# EAGLE board perfboard160x100mm (EAGLE 7.6.0), part 1 of 3
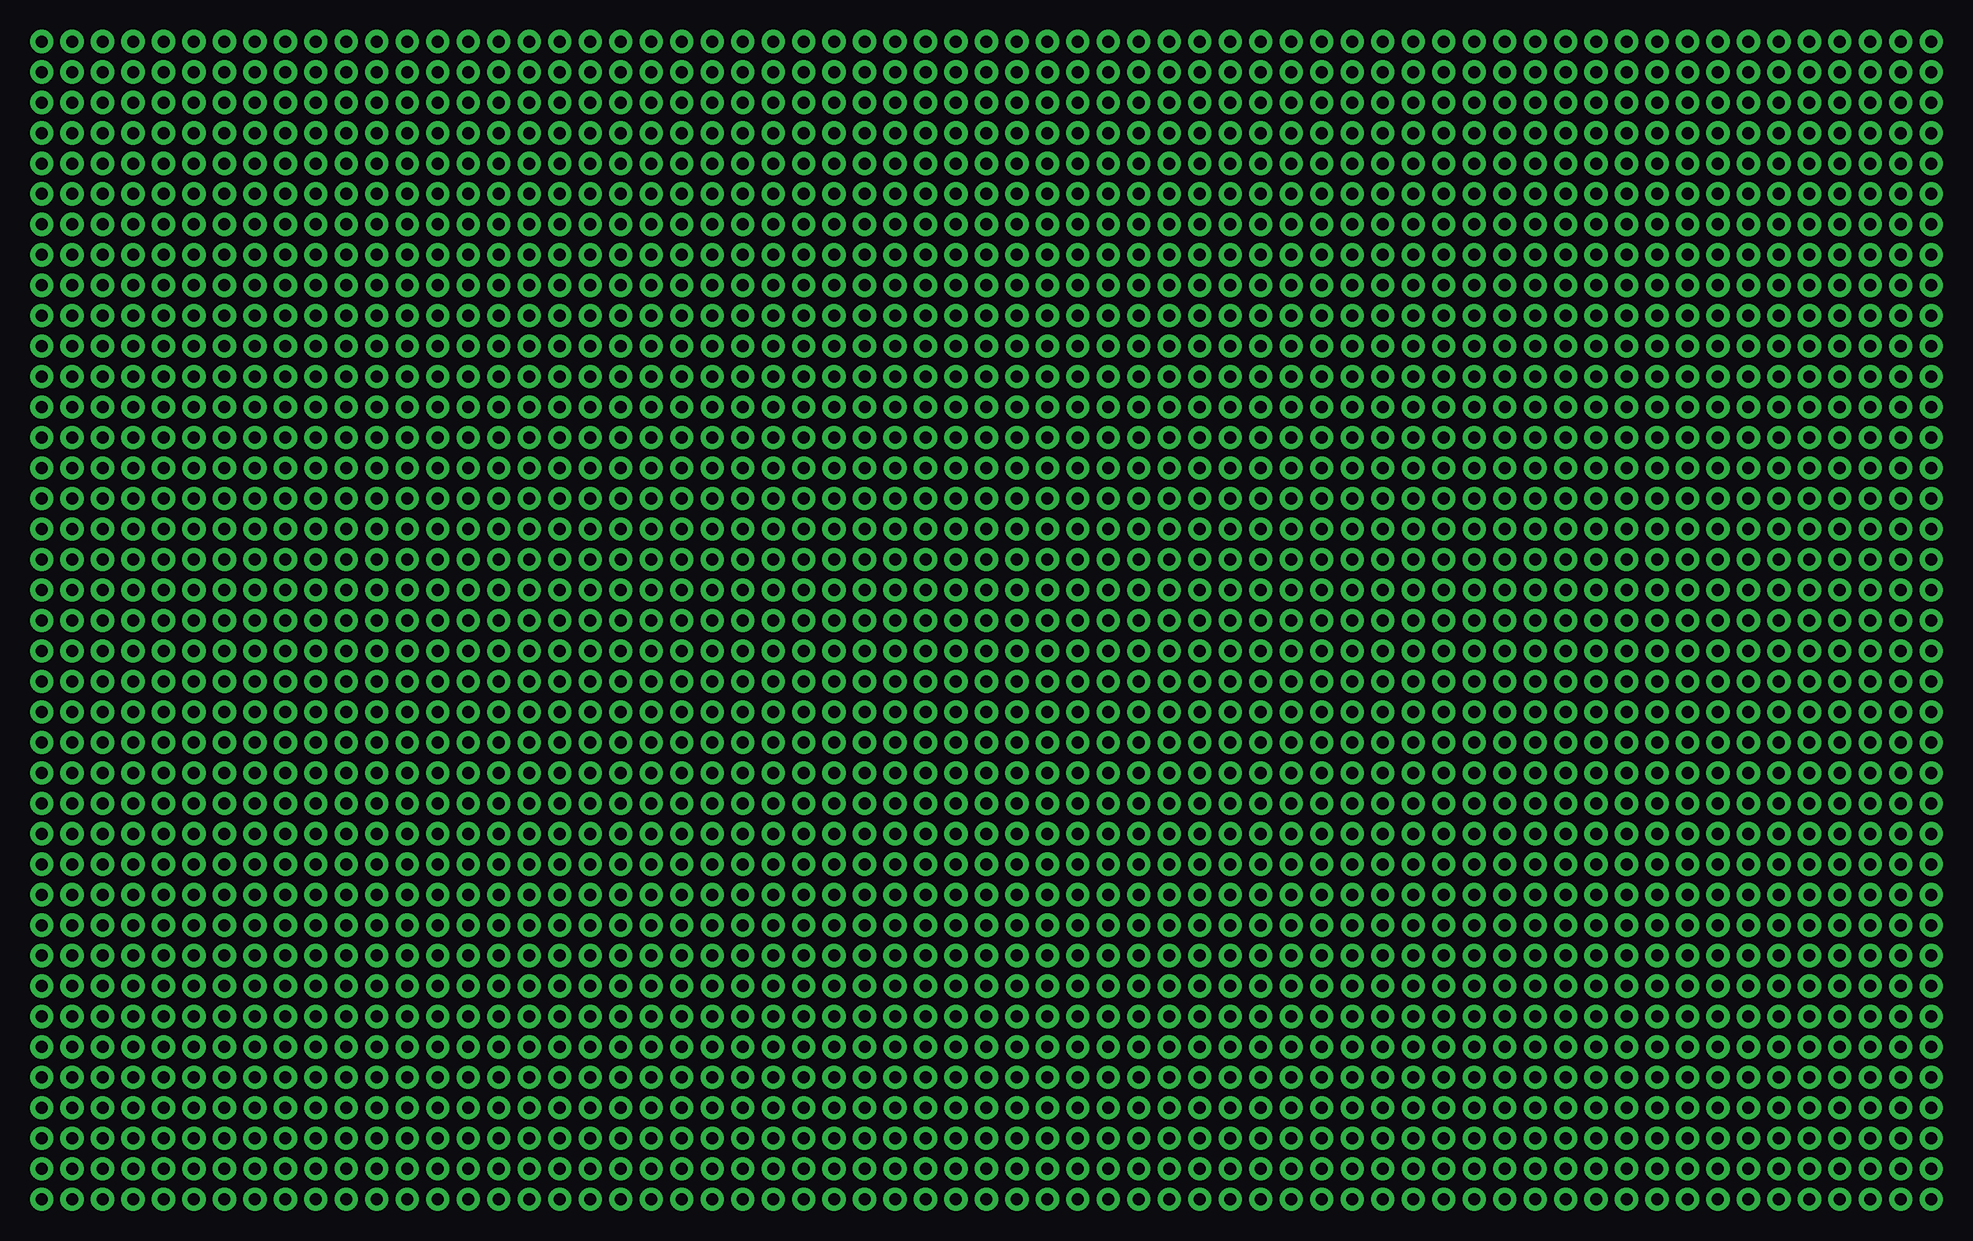
[diagram p0: board, top side]

No outline drawn. Coordinates in mm, seen from the top.
Copper layers (1*16): Top 0.035mm / dielectric 1.5mm / Bottom 0.035mm
Design rules "default": minimum track width 10mil, minimum drill 24mil, track to track 8mil, track to pad 8mil, pad to pad 8mil, via to via 8mil, smd to smd 8mil, copper to edge 40mil, drill to drill 8mil, minimum pad ring 10mil, minimum via ring 8mil, stop-mask expansion 4mil, vias tented up to drill 0mil, thermal gap 10mil

## Placement (x,y rotation side)

## Tracks (layer width: path | path; a pad name or v marks a point on that pad's centre or on a via)
S$1  (via drill 1 pad 1.93)
  other vias: 1.27,97.79
S$2  (via drill 1 pad 1.93)
  other vias: 1.27,95.25
S$3  (via drill 1 pad 1.93)
  other vias: 1.27,92.71
S$4  (via drill 1 pad 1.93)
  other vias: 3.81,97.79
S$5  (via drill 1 pad 1.93)
  other vias: 3.81,95.25
S$6  (via drill 1 pad 1.93)
  other vias: 3.81,92.71
S$7  (via drill 1 pad 1.93)
  other vias: 6.35,97.79
S$8  (via drill 1 pad 1.93)
  other vias: 6.35,95.25
S$9  (via drill 1 pad 1.93)
  other vias: 6.35,92.71
S$10  (via drill 1 pad 1.93)
  other vias: 1.27,85.09 1.27,87.63 1.27,90.17
S$11  (via drill 1 pad 1.93)
  other vias: 3.81,85.09 3.81,87.63 3.81,90.17
S$12  (via drill 1 pad 1.93)
  other vias: 6.35,85.09 6.35,87.63 6.35,90.17
S$13  (via drill 1 pad 1.93)
  other vias: 8.89,97.79
S$14  (via drill 1 pad 1.93)
  other vias: 1.27,82.55
S$15  (via drill 1 pad 1.93)
  other vias: 1.27,80.01
S$16  (via drill 1 pad 1.93)
  other vias: 1.27,77.47
S$17  (via drill 1 pad 1.93)
  other vias: 8.89,95.25
S$18  (via drill 1 pad 1.93)
  other vias: 8.89,92.71
S$19  (via drill 1 pad 1.93)
  other vias: 3.81,82.55
S$20  (via drill 1 pad 1.93)
  other vias: 3.81,80.01
S$21  (via drill 1 pad 1.93)
  other vias: 3.81,77.47
S$22  (via drill 1 pad 1.93)
  other vias: 8.89,85.09 8.89,87.63 8.89,90.17
S$23  (via drill 1 pad 1.93)
  other vias: 11.43,97.79
S$24  (via drill 1 pad 1.93)
  other vias: 11.43,95.25
S$25  (via drill 1 pad 1.93)
  other vias: 11.43,92.71
S$26  (via drill 1 pad 1.93)
  other vias: 11.43,85.09 11.43,87.63 11.43,90.17
S$27  (via drill 1 pad 1.93)
  other vias: 13.97,97.79
S$28  (via drill 1 pad 1.93)
  other vias: 13.97,95.25
S$29  (via drill 1 pad 1.93)
  other vias: 6.35,82.55
S$30  (via drill 1 pad 1.93)
  other vias: 6.35,80.01
S$31  (via drill 1 pad 1.93)
  other vias: 6.35,77.47
S$32  (via drill 1 pad 1.93)
  other vias: 1.27,69.85 1.27,72.39 1.27,74.93
S$33  (via drill 1 pad 1.93)
  other vias: 1.27,67.31
S$34  (via drill 1 pad 1.93)
  other vias: 1.27,64.77
S$35  (via drill 1 pad 1.93)
  other vias: 1.27,62.23
S$36  (via drill 1 pad 1.93)
  other vias: 1.27,59.69
S$37  (via drill 1 pad 1.93)
  other vias: 1.27,57.15
S$38  (via drill 1 pad 1.93)
  other vias: 1.27,54.61
S$39  (via drill 1 pad 1.93)
  other vias: 1.27,52.07
S$40  (via drill 1 pad 1.93)
  other vias: 1.27,49.53
S$41  (via drill 1 pad 1.93)
  other vias: 1.27,46.99
S$42  (via drill 1 pad 1.93)
  other vias: 3.81,69.85 3.81,72.39 3.81,74.93
S$43  (via drill 1 pad 1.93)
  other vias: 3.81,67.31
S$44  (via drill 1 pad 1.93)
  other vias: 3.81,64.77
S$45  (via drill 1 pad 1.93)
  other vias: 3.81,62.23
S$46  (via drill 1 pad 1.93)
  other vias: 3.81,59.69
S$47  (via drill 1 pad 1.93)
  other vias: 3.81,57.15
S$48  (via drill 1 pad 1.93)
  other vias: 3.81,54.61
S$49  (via drill 1 pad 1.93)
  other vias: 3.81,52.07
S$50  (via drill 1 pad 1.93)
  other vias: 3.81,49.53
S$51  (via drill 1 pad 1.93)
  other vias: 3.81,46.99
S$52  (via drill 1 pad 1.93)
  other vias: 6.35,69.85 6.35,72.39 6.35,74.93
S$53  (via drill 1 pad 1.93)
  other vias: 6.35,67.31
S$54  (via drill 1 pad 1.93)
  other vias: 6.35,64.77
S$55  (via drill 1 pad 1.93)
  other vias: 6.35,62.23
S$56  (via drill 1 pad 1.93)
  other vias: 6.35,59.69
S$57  (via drill 1 pad 1.93)
  other vias: 6.35,57.15
S$58  (via drill 1 pad 1.93)
  other vias: 6.35,54.61
S$59  (via drill 1 pad 1.93)
  other vias: 6.35,52.07
S$60  (via drill 1 pad 1.93)
  other vias: 6.35,49.53
S$61  (via drill 1 pad 1.93)
  other vias: 6.35,46.99
S$62  (via drill 1 pad 1.93)
  other vias: 13.97,92.71
S$63  (via drill 1 pad 1.93)
  other vias: 16.51,97.79
S$64  (via drill 1 pad 1.93)
  other vias: 16.51,95.25
S$65  (via drill 1 pad 1.93)
  other vias: 16.51,92.71
S$66  (via drill 1 pad 1.93)
  other vias: 19.05,97.79
S$67  (via drill 1 pad 1.93)
  other vias: 19.05,95.25
S$68  (via drill 1 pad 1.93)
  other vias: 19.05,92.71
S$69  (via drill 1 pad 1.93)
  other vias: 8.89,82.55
S$70  (via drill 1 pad 1.93)
  other vias: 8.89,80.01
S$71  (via drill 1 pad 1.93)
  other vias: 8.89,77.47
S$72  (via drill 1 pad 1.93)
  other vias: 8.89,69.85 8.89,72.39 8.89,74.93
S$73  (via drill 1 pad 1.93)
  other vias: 8.89,67.31
S$74  (via drill 1 pad 1.93)
  other vias: 8.89,64.77
S$75  (via drill 1 pad 1.93)
  other vias: 8.89,62.23
S$76  (via drill 1 pad 1.93)
  other vias: 8.89,59.69
S$77  (via drill 1 pad 1.93)
  other vias: 8.89,57.15
S$78  (via drill 1 pad 1.93)
  other vias: 8.89,54.61
S$79  (via drill 1 pad 1.93)
  other vias: 8.89,52.07
S$80  (via drill 1 pad 1.93)
  other vias: 8.89,49.53
S$81  (via drill 1 pad 1.93)
  other vias: 8.89,46.99
S$82  (via drill 1 pad 1.93)
  other vias: 13.97,85.09 13.97,87.63 13.97,90.17
S$83  (via drill 1 pad 1.93)
  other vias: 16.51,85.09 16.51,87.63 16.51,90.17
S$84  (via drill 1 pad 1.93)
  other vias: 19.05,85.09 19.05,87.63 19.05,90.17
S$85  (via drill 1 pad 1.93)
  other vias: 21.59,97.79
S$86  (via drill 1 pad 1.93)
  other vias: 21.59,95.25
S$87  (via drill 1 pad 1.93)
  other vias: 21.59,92.71
S$88  (via drill 1 pad 1.93)
  other vias: 21.59,85.09 21.59,87.63 21.59,90.17
S$89  (via drill 1 pad 1.93)
  other vias: 11.43,82.55
S$90  (via drill 1 pad 1.93)
  other vias: 11.43,80.01
S$91  (via drill 1 pad 1.93)
  other vias: 11.43,77.47
S$92  (via drill 1 pad 1.93)
  other vias: 11.43,69.85 11.43,72.39 11.43,74.93
S$93  (via drill 1 pad 1.93)
  other vias: 11.43,67.31
S$94  (via drill 1 pad 1.93)
  other vias: 11.43,64.77
S$95  (via drill 1 pad 1.93)
  other vias: 11.43,62.23
S$96  (via drill 1 pad 1.93)
  other vias: 11.43,59.69
S$97  (via drill 1 pad 1.93)
  other vias: 11.43,57.15
S$98  (via drill 1 pad 1.93)
  other vias: 11.43,54.61
S$99  (via drill 1 pad 1.93)
  other vias: 11.43,52.07
S$100  (via drill 1 pad 1.93)
  other vias: 11.43,49.53
S$101  (via drill 1 pad 1.93)
  other vias: 11.43,46.99
S$102  (via drill 1 pad 1.93)
  other vias: 24.13,97.79
S$103  (via drill 1 pad 1.93)
  other vias: 24.13,95.25
S$104  (via drill 1 pad 1.93)
  other vias: 24.13,92.71
S$105  (via drill 1 pad 1.93)
  other vias: 24.13,85.09 24.13,87.63 24.13,90.17
S$106  (via drill 1 pad 1.93)
  other vias: 26.67,97.79
S$107  (via drill 1 pad 1.93)
  other vias: 26.67,95.25
S$108  (via drill 1 pad 1.93)
  other vias: 26.67,92.71
S$109  (via drill 1 pad 1.93)
  other vias: 13.97,82.55
S$110  (via drill 1 pad 1.93)
  other vias: 13.97,80.01
S$111  (via drill 1 pad 1.93)
  other vias: 13.97,77.47
S$112  (via drill 1 pad 1.93)
  other vias: 29.21,97.79
S$113  (via drill 1 pad 1.93)
  other vias: 29.21,95.25
S$114  (via drill 1 pad 1.93)
  other vias: 29.21,92.71
S$115  (via drill 1 pad 1.93)
  other vias: 31.75,97.79
S$116  (via drill 1 pad 1.93)
  other vias: 31.75,95.25
S$117  (via drill 1 pad 1.93)
  other vias: 31.75,92.71
S$118  (via drill 1 pad 1.93)
  other vias: 26.67,85.09 26.67,87.63 26.67,90.17
S$119  (via drill 1 pad 1.93)
  other vias: 16.51,82.55
S$120  (via drill 1 pad 1.93)
  other vias: 16.51,80.01
S$121  (via drill 1 pad 1.93)
  other vias: 16.51,77.47
S$122  (via drill 1 pad 1.93)
  other vias: 29.21,85.09 29.21,87.63 29.21,90.17
S$123  (via drill 1 pad 1.93)
  other vias: 31.75,85.09 31.75,87.63 31.75,90.17
S$124  (via drill 1 pad 1.93)
  other vias: 34.29,97.79
S$125  (via drill 1 pad 1.93)
  other vias: 34.29,95.25
S$126  (via drill 1 pad 1.93)
  other vias: 34.29,92.71
S$127  (via drill 1 pad 1.93)
  other vias: 34.29,85.09 34.29,87.63 34.29,90.17
S$128  (via drill 1 pad 1.93)
  other vias: 36.83,97.79
S$129  (via drill 1 pad 1.93)
  other vias: 19.05,82.55
S$130  (via drill 1 pad 1.93)
  other vias: 19.05,80.01
S$131  (via drill 1 pad 1.93)
  other vias: 19.05,77.47
S$132  (via drill 1 pad 1.93)
  other vias: 13.97,69.85 13.97,72.39 13.97,74.93
S$133  (via drill 1 pad 1.93)
  other vias: 13.97,67.31
S$134  (via drill 1 pad 1.93)
  other vias: 13.97,64.77
S$135  (via drill 1 pad 1.93)
  other vias: 13.97,62.23
S$136  (via drill 1 pad 1.93)
  other vias: 13.97,59.69
S$137  (via drill 1 pad 1.93)
  other vias: 13.97,57.15
S$138  (via drill 1 pad 1.93)
  other vias: 13.97,54.61
S$139  (via drill 1 pad 1.93)
  other vias: 13.97,52.07
S$140  (via drill 1 pad 1.93)
  other vias: 13.97,49.53
S$141  (via drill 1 pad 1.93)
  other vias: 13.97,46.99
S$142  (via drill 1 pad 1.93)
  other vias: 16.51,69.85 16.51,72.39 16.51,74.93
S$143  (via drill 1 pad 1.93)
  other vias: 16.51,67.31
S$144  (via drill 1 pad 1.93)
  other vias: 16.51,64.77
S$145  (via drill 1 pad 1.93)
  other vias: 16.51,62.23
S$146  (via drill 1 pad 1.93)
  other vias: 16.51,59.69
S$147  (via drill 1 pad 1.93)
  other vias: 16.51,57.15
S$148  (via drill 1 pad 1.93)
  other vias: 16.51,54.61
S$149  (via drill 1 pad 1.93)
  other vias: 16.51,52.07
S$150  (via drill 1 pad 1.93)
  other vias: 16.51,49.53
S$151  (via drill 1 pad 1.93)
  other vias: 16.51,46.99
S$152  (via drill 1 pad 1.93)
  other vias: 19.05,69.85 19.05,72.39 19.05,74.93
S$153  (via drill 1 pad 1.93)
  other vias: 19.05,67.31
S$154  (via drill 1 pad 1.93)
  other vias: 19.05,64.77
S$155  (via drill 1 pad 1.93)
  other vias: 19.05,62.23
S$156  (via drill 1 pad 1.93)
  other vias: 19.05,59.69
S$157  (via drill 1 pad 1.93)
  other vias: 19.05,57.15
S$158  (via drill 1 pad 1.93)
  other vias: 19.05,54.61
S$159  (via drill 1 pad 1.93)
  other vias: 19.05,52.07
S$160  (via drill 1 pad 1.93)
  other vias: 19.05,49.53
S$161  (via drill 1 pad 1.93)
  other vias: 19.05,46.99
S$162  (via drill 1 pad 1.93)
  other vias: 36.83,95.25
S$163  (via drill 1 pad 1.93)
  other vias: 36.83,92.71
S$164  (via drill 1 pad 1.93)
  other vias: 36.83,85.09 36.83,87.63 36.83,90.17
S$165  (via drill 1 pad 1.93)
  other vias: 39.37,97.79
S$166  (via drill 1 pad 1.93)
  other vias: 39.37,95.25
S$167  (via drill 1 pad 1.93)
  other vias: 39.37,92.71
S$168  (via drill 1 pad 1.93)
  other vias: 41.91,97.79
S$169  (via drill 1 pad 1.93)
  other vias: 21.59,82.55
S$170  (via drill 1 pad 1.93)
  other vias: 21.59,80.01
S$171  (via drill 1 pad 1.93)
  other vias: 21.59,77.47
S$172  (via drill 1 pad 1.93)
  other vias: 21.59,69.85 21.59,72.39 21.59,74.93
S$173  (via drill 1 pad 1.93)
  other vias: 21.59,67.31
S$174  (via drill 1 pad 1.93)
  other vias: 21.59,64.77
S$175  (via drill 1 pad 1.93)
  other vias: 21.59,62.23
S$176  (via drill 1 pad 1.93)
  other vias: 21.59,59.69
S$177  (via drill 1 pad 1.93)
  other vias: 21.59,57.15
S$178  (via drill 1 pad 1.93)
  other vias: 21.59,54.61
S$179  (via drill 1 pad 1.93)
  other vias: 21.59,52.07
S$180  (via drill 1 pad 1.93)
  other vias: 21.59,49.53
S$181  (via drill 1 pad 1.93)
  other vias: 21.59,46.99
S$182  (via drill 1 pad 1.93)
  other vias: 41.91,95.25
S$183  (via drill 1 pad 1.93)
  other vias: 41.91,92.71
S$184  (via drill 1 pad 1.93)
  other vias: 44.45,97.79
S$185  (via drill 1 pad 1.93)
  other vias: 44.45,95.25
S$186  (via drill 1 pad 1.93)
  other vias: 44.45,92.71
S$187  (via drill 1 pad 1.93)
  other vias: 39.37,85.09 39.37,87.63 39.37,90.17
S$188  (via drill 1 pad 1.93)
  other vias: 41.91,85.09 41.91,87.63 41.91,90.17
S$189  (via drill 1 pad 1.93)
  other vias: 24.13,82.55
S$190  (via drill 1 pad 1.93)
  other vias: 24.13,80.01
S$191  (via drill 1 pad 1.93)
  other vias: 24.13,77.47
S$192  (via drill 1 pad 1.93)
  other vias: 24.13,69.85 24.13,72.39 24.13,74.93
S$193  (via drill 1 pad 1.93)
  other vias: 24.13,67.31
S$194  (via drill 1 pad 1.93)
  other vias: 24.13,64.77
S$195  (via drill 1 pad 1.93)
  other vias: 24.13,62.23
S$196  (via drill 1 pad 1.93)
  other vias: 24.13,59.69
S$197  (via drill 1 pad 1.93)
  other vias: 24.13,57.15
S$198  (via drill 1 pad 1.93)
  other vias: 24.13,54.61
S$199  (via drill 1 pad 1.93)
  other vias: 24.13,52.07
S$200  (via drill 1 pad 1.93)
  other vias: 24.13,49.53
S$201  (via drill 1 pad 1.93)
  other vias: 24.13,46.99
S$202  (via drill 1 pad 1.93)
  other vias: 44.45,85.09 44.45,87.63 44.45,90.17
S$203  (via drill 1 pad 1.93)
  other vias: 46.99,97.79
S$204  (via drill 1 pad 1.93)
  other vias: 46.99,95.25
S$205  (via drill 1 pad 1.93)
  other vias: 46.99,92.71
S$206  (via drill 1 pad 1.93)
  other vias: 46.99,85.09 46.99,87.63 46.99,90.17
S$207  (via drill 1 pad 1.93)
  other vias: 49.53,97.79
S$208  (via drill 1 pad 1.93)
  other vias: 49.53,95.25
S$209  (via drill 1 pad 1.93)
  other vias: 26.67,82.55
S$210  (via drill 1 pad 1.93)
  other vias: 26.67,80.01
S$211  (via drill 1 pad 1.93)
  other vias: 26.67,77.47
S$212  (via drill 1 pad 1.93)
  other vias: 49.53,92.71
S$213  (via drill 1 pad 1.93)
  other vias: 49.53,85.09 49.53,87.63 49.53,90.17
S$214  (via drill 1 pad 1.93)
  other vias: 52.07,97.79
S$215  (via drill 1 pad 1.93)
  other vias: 52.07,95.25
S$216  (via drill 1 pad 1.93)
  other vias: 52.07,92.71
S$217  (via drill 1 pad 1.93)
  other vias: 54.61,97.79
S$218  (via drill 1 pad 1.93)
  other vias: 54.61,95.25
S$219  (via drill 1 pad 1.93)
  other vias: 29.21,82.55
S$220  (via drill 1 pad 1.93)
  other vias: 29.21,80.01
S$221  (via drill 1 pad 1.93)
  other vias: 29.21,77.47
S$222  (via drill 1 pad 1.93)
  other vias: 54.61,92.71
S$223  (via drill 1 pad 1.93)
  other vias: 57.15,97.79
S$224  (via drill 1 pad 1.93)
  other vias: 57.15,95.25
S$225  (via drill 1 pad 1.93)
  other vias: 57.15,92.71
S$226  (via drill 1 pad 1.93)
  other vias: 52.07,85.09 52.07,87.63 52.07,90.17
S$227  (via drill 1 pad 1.93)
  other vias: 54.61,85.09 54.61,87.63 54.61,90.17
S$228  (via drill 1 pad 1.93)
  other vias: 57.15,85.09 57.15,87.63 57.15,90.17
S$229  (via drill 1 pad 1.93)
  other vias: 31.75,82.55
S$230  (via drill 1 pad 1.93)
  other vias: 31.75,80.01
S$231  (via drill 1 pad 1.93)
  other vias: 31.75,77.47
S$232  (via drill 1 pad 1.93)
  other vias: 26.67,69.85 26.67,72.39 26.67,74.93
S$233  (via drill 1 pad 1.93)
  other vias: 26.67,67.31
S$234  (via drill 1 pad 1.93)
  other vias: 26.67,64.77
S$235  (via drill 1 pad 1.93)
  other vias: 26.67,62.23
S$236  (via drill 1 pad 1.93)
  other vias: 26.67,59.69
S$237  (via drill 1 pad 1.93)
  other vias: 26.67,57.15
S$238  (via drill 1 pad 1.93)
  other vias: 26.67,54.61
S$239  (via drill 1 pad 1.93)
  other vias: 26.67,52.07
S$240  (via drill 1 pad 1.93)
  other vias: 26.67,49.53
S$241  (via drill 1 pad 1.93)
  other vias: 26.67,46.99
S$242  (via drill 1 pad 1.93)
  other vias: 29.21,69.85 29.21,72.39 29.21,74.93
S$243  (via drill 1 pad 1.93)
  other vias: 29.21,67.31
S$244  (via drill 1 pad 1.93)
  other vias: 29.21,64.77
S$245  (via drill 1 pad 1.93)
  other vias: 29.21,62.23
S$246  (via drill 1 pad 1.93)
  other vias: 29.21,59.69
S$247  (via drill 1 pad 1.93)
  other vias: 29.21,57.15
S$248  (via drill 1 pad 1.93)
  other vias: 29.21,54.61
S$249  (via drill 1 pad 1.93)
  other vias: 29.21,52.07
S$250  (via drill 1 pad 1.93)
  other vias: 29.21,49.53
S$251  (via drill 1 pad 1.93)
  other vias: 29.21,46.99
S$252  (via drill 1 pad 1.93)
  other vias: 31.75,69.85 31.75,72.39 31.75,74.93
S$253  (via drill 1 pad 1.93)
  other vias: 31.75,67.31
S$254  (via drill 1 pad 1.93)
  other vias: 31.75,64.77
S$255  (via drill 1 pad 1.93)
  other vias: 31.75,62.23
S$256  (via drill 1 pad 1.93)
  other vias: 31.75,59.69
S$257  (via drill 1 pad 1.93)
  other vias: 31.75,57.15
S$258  (via drill 1 pad 1.93)
  other vias: 31.75,54.61
S$259  (via drill 1 pad 1.93)
  other vias: 31.75,52.07
S$260  (via drill 1 pad 1.93)
  other vias: 31.75,49.53
S$261  (via drill 1 pad 1.93)
  other vias: 31.75,46.99
S$262  (via drill 1 pad 1.93)
  other vias: 59.69,97.79
S$263  (via drill 1 pad 1.93)
  other vias: 59.69,95.25
S$264  (via drill 1 pad 1.93)
  other vias: 59.69,92.71
S$265  (via drill 1 pad 1.93)
  other vias: 59.69,85.09 59.69,87.63 59.69,90.17
S$266  (via drill 1 pad 1.93)
  other vias: 62.23,97.79
S$267  (via drill 1 pad 1.93)
  other vias: 62.23,95.25
S$268  (via drill 1 pad 1.93)
  other vias: 62.23,92.71
S$269  (via drill 1 pad 1.93)
  other vias: 34.29,82.55
S$270  (via drill 1 pad 1.93)
  other vias: 34.29,80.01
S$271  (via drill 1 pad 1.93)
  other vias: 34.29,77.47
S$272  (via drill 1 pad 1.93)
  other vias: 34.29,69.85 34.29,72.39 34.29,74.93
S$273  (via drill 1 pad 1.93)
  other vias: 34.29,67.31
S$274  (via drill 1 pad 1.93)
  other vias: 34.29,64.77
S$275  (via drill 1 pad 1.93)
  other vias: 34.29,62.23
S$276  (via drill 1 pad 1.93)
  other vias: 34.29,59.69
S$277  (via drill 1 pad 1.93)
  other vias: 34.29,57.15
S$278  (via drill 1 pad 1.93)
  other vias: 34.29,54.61
S$279  (via drill 1 pad 1.93)
  other vias: 34.29,52.07
S$280  (via drill 1 pad 1.93)
  other vias: 34.29,49.53
S$281  (via drill 1 pad 1.93)
  other vias: 34.29,46.99
S$282  (via drill 1 pad 1.93)
  other vias: 62.23,85.09 62.23,87.63 62.23,90.17
S$283  (via drill 1 pad 1.93)
  other vias: 64.77,97.79
S$284  (via drill 1 pad 1.93)
  other vias: 64.77,95.25
S$285  (via drill 1 pad 1.93)
  other vias: 64.77,92.71
S$286  (via drill 1 pad 1.93)
  other vias: 67.31,97.79
S$287  (via drill 1 pad 1.93)
  other vias: 67.31,95.25
S$288  (via drill 1 pad 1.93)
  other vias: 67.31,92.71
S$289  (via drill 1 pad 1.93)
  other vias: 36.83,82.55
S$290  (via drill 1 pad 1.93)
  other vias: 36.83,80.01
S$291  (via drill 1 pad 1.93)
  other vias: 36.83,77.47
S$292  (via drill 1 pad 1.93)
  other vias: 36.83,69.85 36.83,72.39 36.83,74.93
S$293  (via drill 1 pad 1.93)
  other vias: 36.83,67.31
S$294  (via drill 1 pad 1.93)
  other vias: 36.83,64.77
S$295  (via drill 1 pad 1.93)
  other vias: 36.83,62.23
S$296  (via drill 1 pad 1.93)
  other vias: 36.83,59.69
S$297  (via drill 1 pad 1.93)
  other vias: 36.83,57.15
S$298  (via drill 1 pad 1.93)
  other vias: 36.83,54.61
S$299  (via drill 1 pad 1.93)
  other vias: 36.83,52.07
S$300  (via drill 1 pad 1.93)
  other vias: 36.83,49.53
S$301  (via drill 1 pad 1.93)
  other vias: 36.83,46.99
S$302  (via drill 1 pad 1.93)
  other vias: 69.85,97.79
S$303  (via drill 1 pad 1.93)
  other vias: 69.85,95.25
S$304  (via drill 1 pad 1.93)
  other vias: 69.85,92.71
S$305  (via drill 1 pad 1.93)
  other vias: 64.77,85.09 64.77,87.63 64.77,90.17
S$306  (via drill 1 pad 1.93)
  other vias: 67.31,85.09 67.31,87.63 67.31,90.17
S$307  (via drill 1 pad 1.93)
  other vias: 69.85,85.09 69.85,87.63 69.85,90.17
S$308  (via drill 1 pad 1.93)
  other vias: 72.39,97.79
S$309  (via drill 1 pad 1.93)
  other vias: 39.37,82.55
S$310  (via drill 1 pad 1.93)
  other vias: 39.37,80.01
S$311  (via drill 1 pad 1.93)
  other vias: 39.37,77.47
S$312  (via drill 1 pad 1.93)
  other vias: 72.39,95.25
S$313  (via drill 1 pad 1.93)
  other vias: 72.39,92.71
S$314  (via drill 1 pad 1.93)
  other vias: 72.39,85.09 72.39,87.63 72.39,90.17
S$315  (via drill 1 pad 1.93)
  other vias: 74.93,97.79
S$316  (via drill 1 pad 1.93)
  other vias: 74.93,95.25
S$317  (via drill 1 pad 1.93)
  other vias: 74.93,92.71
S$318  (via drill 1 pad 1.93)
  other vias: 74.93,85.09 74.93,87.63 74.93,90.17
S$319  (via drill 1 pad 1.93)
  other vias: 41.91,82.55
S$320  (via drill 1 pad 1.93)
  other vias: 41.91,80.01
S$321  (via drill 1 pad 1.93)
  other vias: 41.91,77.47
S$322  (via drill 1 pad 1.93)
  other vias: 77.47,82.55
S$323  (via drill 1 pad 1.93)
  other vias: 77.47,80.01
S$324  (via drill 1 pad 1.93)
  other vias: 77.47,77.47
S$325  (via drill 1 pad 1.93)
  other vias: 80.01,82.55
S$326  (via drill 1 pad 1.93)
  other vias: 80.01,80.01
S$327  (via drill 1 pad 1.93)
  other vias: 80.01,77.47
S$328  (via drill 1 pad 1.93)
  other vias: 82.55,82.55
S$329  (via drill 1 pad 1.93)
  other vias: 44.45,82.55
S$330  (via drill 1 pad 1.93)
  other vias: 44.45,80.01
S$331  (via drill 1 pad 1.93)
  other vias: 44.45,77.47
S$332  (via drill 1 pad 1.93)
  other vias: 39.37,69.85 39.37,72.39 39.37,74.93
S$333  (via drill 1 pad 1.93)
  other vias: 39.37,67.31
S$334  (via drill 1 pad 1.93)
  other vias: 39.37,64.77
S$335  (via drill 1 pad 1.93)
  other vias: 39.37,62.23
S$336  (via drill 1 pad 1.93)
  other vias: 39.37,59.69
S$337  (via drill 1 pad 1.93)
  other vias: 39.37,57.15
S$338  (via drill 1 pad 1.93)
  other vias: 39.37,54.61
S$339  (via drill 1 pad 1.93)
  other vias: 39.37,52.07
S$340  (via drill 1 pad 1.93)
  other vias: 39.37,49.53
S$341  (via drill 1 pad 1.93)
  other vias: 39.37,46.99
S$342  (via drill 1 pad 1.93)
  other vias: 41.91,69.85 41.91,72.39 41.91,74.93
S$343  (via drill 1 pad 1.93)
  other vias: 41.91,67.31
S$344  (via drill 1 pad 1.93)
  other vias: 41.91,64.77
S$345  (via drill 1 pad 1.93)
  other vias: 41.91,62.23
S$346  (via drill 1 pad 1.93)
  other vias: 41.91,59.69
S$347  (via drill 1 pad 1.93)
  other vias: 41.91,57.15
S$348  (via drill 1 pad 1.93)
  other vias: 41.91,54.61
S$349  (via drill 1 pad 1.93)
  other vias: 41.91,52.07
S$350  (via drill 1 pad 1.93)
  other vias: 41.91,49.53
S$351  (via drill 1 pad 1.93)
  other vias: 41.91,46.99
S$352  (via drill 1 pad 1.93)
  other vias: 44.45,69.85 44.45,72.39 44.45,74.93
S$353  (via drill 1 pad 1.93)
  other vias: 44.45,67.31
S$354  (via drill 1 pad 1.93)
  other vias: 44.45,64.77
S$355  (via drill 1 pad 1.93)
  other vias: 44.45,62.23
S$356  (via drill 1 pad 1.93)
  other vias: 44.45,59.69
S$357  (via drill 1 pad 1.93)
  other vias: 44.45,57.15
S$358  (via drill 1 pad 1.93)
  other vias: 44.45,54.61
S$359  (via drill 1 pad 1.93)
  other vias: 44.45,52.07
S$360  (via drill 1 pad 1.93)
  other vias: 44.45,49.53
S$361  (via drill 1 pad 1.93)
  other vias: 44.45,46.99
S$362  (via drill 1 pad 1.93)
  other vias: 82.55,80.01
S$363  (via drill 1 pad 1.93)
  other vias: 82.55,77.47
S$364  (via drill 1 pad 1.93)
  other vias: 77.47,69.85 77.47,72.39 77.47,74.93
S$365  (via drill 1 pad 1.93)
  other vias: 77.47,67.31
S$366  (via drill 1 pad 1.93)
  other vias: 77.47,64.77
S$367  (via drill 1 pad 1.93)
  other vias: 77.47,62.23
S$368  (via drill 1 pad 1.93)
  other vias: 77.47,59.69
S$369  (via drill 1 pad 1.93)
  other vias: 46.99,82.55
S$370  (via drill 1 pad 1.93)
  other vias: 46.99,80.01
S$371  (via drill 1 pad 1.93)
  other vias: 46.99,77.47
S$372  (via drill 1 pad 1.93)
  other vias: 46.99,69.85 46.99,72.39 46.99,74.93
S$373  (via drill 1 pad 1.93)
  other vias: 46.99,67.31
S$374  (via drill 1 pad 1.93)
  other vias: 46.99,64.77
S$375  (via drill 1 pad 1.93)
  other vias: 46.99,62.23
S$376  (via drill 1 pad 1.93)
  other vias: 46.99,59.69
S$377  (via drill 1 pad 1.93)
  other vias: 46.99,57.15
S$378  (via drill 1 pad 1.93)
  other vias: 46.99,54.61
S$379  (via drill 1 pad 1.93)
  other vias: 46.99,52.07
S$380  (via drill 1 pad 1.93)
  other vias: 46.99,49.53
S$381  (via drill 1 pad 1.93)
  other vias: 46.99,46.99
S$382  (via drill 1 pad 1.93)
  other vias: 77.47,57.15
S$383  (via drill 1 pad 1.93)
  other vias: 77.47,54.61
S$384  (via drill 1 pad 1.93)
  other vias: 77.47,52.07
S$385  (via drill 1 pad 1.93)
  other vias: 77.47,49.53
S$386  (via drill 1 pad 1.93)
  other vias: 77.47,46.99
S$387  (via drill 1 pad 1.93)
  other vias: 80.01,69.85 80.01,72.39 80.01,74.93
S$388  (via drill 1 pad 1.93)
  other vias: 80.01,67.31
S$389  (via drill 1 pad 1.93)
  other vias: 49.53,82.55
S$390  (via drill 1 pad 1.93)
  other vias: 49.53,80.01
S$391  (via drill 1 pad 1.93)
  other vias: 49.53,77.47
S$392  (via drill 1 pad 1.93)
  other vias: 49.53,69.85 49.53,72.39 49.53,74.93
S$393  (via drill 1 pad 1.93)
  other vias: 49.53,67.31
S$394  (via drill 1 pad 1.93)
  other vias: 49.53,64.77
S$395  (via drill 1 pad 1.93)
  other vias: 49.53,62.23
S$396  (via drill 1 pad 1.93)
  other vias: 49.53,59.69
S$397  (via drill 1 pad 1.93)
  other vias: 49.53,57.15
S$398  (via drill 1 pad 1.93)
  other vias: 49.53,54.61
S$399  (via drill 1 pad 1.93)
  other vias: 49.53,52.07
S$400  (via drill 1 pad 1.93)
  other vias: 49.53,49.53
S$401  (via drill 1 pad 1.93)
  other vias: 49.53,46.99
S$402  (via drill 1 pad 1.93)
  other vias: 1.27,39.37 1.27,41.91 1.27,44.45
S$403  (via drill 1 pad 1.93)
  other vias: 1.27,36.83
S$404  (via drill 1 pad 1.93)
  other vias: 1.27,34.29
S$405  (via drill 1 pad 1.93)
  other vias: 1.27,31.75
S$406  (via drill 1 pad 1.93)
  other vias: 1.27,29.21
S$407  (via drill 1 pad 1.93)
  other vias: 1.27,26.67
S$408  (via drill 1 pad 1.93)
  other vias: 1.27,24.13
S$409  (via drill 1 pad 1.93)
  other vias: 1.27,21.59
S$410  (via drill 1 pad 1.93)
  other vias: 1.27,19.05
S$411  (via drill 1 pad 1.93)
  other vias: 1.27,16.51
S$412  (via drill 1 pad 1.93)
  other vias: 3.81,39.37 3.81,41.91 3.81,44.45
S$413  (via drill 1 pad 1.93)
  other vias: 3.81,36.83
S$414  (via drill 1 pad 1.93)
  other vias: 3.81,34.29
S$415  (via drill 1 pad 1.93)
  other vias: 3.81,31.75
S$416  (via drill 1 pad 1.93)
  other vias: 3.81,29.21
S$417  (via drill 1 pad 1.93)
  other vias: 3.81,26.67
S$418  (via drill 1 pad 1.93)
  other vias: 3.81,24.13
S$419  (via drill 1 pad 1.93)
  other vias: 3.81,21.59
S$420  (via drill 1 pad 1.93)
  other vias: 3.81,19.05
S$421  (via drill 1 pad 1.93)
  other vias: 3.81,16.51
S$422  (via drill 1 pad 1.93)
  other vias: 6.35,39.37 6.35,41.91 6.35,44.45
S$423  (via drill 1 pad 1.93)
  other vias: 6.35,36.83
S$424  (via drill 1 pad 1.93)
  other vias: 6.35,34.29
S$425  (via drill 1 pad 1.93)
  other vias: 6.35,31.75
S$426  (via drill 1 pad 1.93)
  other vias: 6.35,29.21
S$427  (via drill 1 pad 1.93)
  other vias: 6.35,26.67
S$428  (via drill 1 pad 1.93)
  other vias: 6.35,24.13
S$429  (via drill 1 pad 1.93)
  other vias: 6.35,21.59
S$430  (via drill 1 pad 1.93)
  other vias: 6.35,19.05
S$431  (via drill 1 pad 1.93)
  other vias: 6.35,16.51
S$432  (via drill 1 pad 1.93)
  other vias: 1.27,8.89 1.27,11.43 1.27,13.97
S$433  (via drill 1 pad 1.93)
  other vias: 1.27,6.35
S$434  (via drill 1 pad 1.93)
  other vias: 1.27,3.81
S$435  (via drill 1 pad 1.93)
  other vias: 1.27,1.27
S$436  (via drill 1 pad 1.93)
  other vias: 26.67,39.37 26.67,41.91 26.67,44.45
S$437  (via drill 1 pad 1.93)
  other vias: 26.67,36.83
S$438  (via drill 1 pad 1.93)
  other vias: 26.67,34.29
S$439  (via drill 1 pad 1.93)
  other vias: 26.67,31.75
S$440  (via drill 1 pad 1.93)
  other vias: 26.67,29.21
S$441  (via drill 1 pad 1.93)
  other vias: 26.67,26.67
S$442  (via drill 1 pad 1.93)
  other vias: 3.81,8.89 3.81,11.43 3.81,13.97
S$443  (via drill 1 pad 1.93)
  other vias: 3.81,6.35
S$444  (via drill 1 pad 1.93)
  other vias: 3.81,3.81
S$445  (via drill 1 pad 1.93)
  other vias: 26.67,24.13
S$446  (via drill 1 pad 1.93)
  other vias: 26.67,21.59
S$447  (via drill 1 pad 1.93)
  other vias: 26.67,19.05
S$448  (via drill 1 pad 1.93)
  other vias: 3.81,1.27
S$449  (via drill 1 pad 1.93)
  other vias: 26.67,16.51
S$450  (via drill 1 pad 1.93)
  other vias: 29.21,39.37 29.21,41.91 29.21,44.45
S$451  (via drill 1 pad 1.93)
  other vias: 29.21,36.83
S$452  (via drill 1 pad 1.93)
  other vias: 6.35,8.89 6.35,11.43 6.35,13.97
S$453  (via drill 1 pad 1.93)
  other vias: 6.35,6.35
S$454  (via drill 1 pad 1.93)
  other vias: 6.35,3.81
S$455  (via drill 1 pad 1.93)
  other vias: 29.21,34.29
S$456  (via drill 1 pad 1.93)
  other vias: 29.21,31.75
S$457  (via drill 1 pad 1.93)
  other vias: 29.21,29.21
S$458  (via drill 1 pad 1.93)
  other vias: 6.35,1.27
S$459  (via drill 1 pad 1.93)
  other vias: 29.21,26.67
S$460  (via drill 1 pad 1.93)
  other vias: 29.21,24.13
S$461  (via drill 1 pad 1.93)
  other vias: 29.21,21.59
S$462  (via drill 1 pad 1.93)
  other vias: 8.89,39.37 8.89,41.91 8.89,44.45
S$463  (via drill 1 pad 1.93)
  other vias: 8.89,36.83
S$464  (via drill 1 pad 1.93)
  other vias: 8.89,34.29
S$465  (via drill 1 pad 1.93)
  other vias: 8.89,31.75
S$466  (via drill 1 pad 1.93)
  other vias: 8.89,29.21
S$467  (via drill 1 pad 1.93)
  other vias: 8.89,26.67
S$468  (via drill 1 pad 1.93)
  other vias: 8.89,24.13
S$469  (via drill 1 pad 1.93)
  other vias: 8.89,21.59
S$470  (via drill 1 pad 1.93)
  other vias: 8.89,19.05
S$471  (via drill 1 pad 1.93)
  other vias: 8.89,16.51
S$472  (via drill 1 pad 1.93)
  other vias: 8.89,8.89 8.89,11.43 8.89,13.97
S$473  (via drill 1 pad 1.93)
  other vias: 8.89,6.35
S$474  (via drill 1 pad 1.93)
  other vias: 8.89,3.81
S$475  (via drill 1 pad 1.93)
  other vias: 29.21,19.05
S$476  (via drill 1 pad 1.93)
  other vias: 29.21,16.51
S$477  (via drill 1 pad 1.93)
  other vias: 31.75,39.37 31.75,41.91 31.75,44.45
S$478  (via drill 1 pad 1.93)
  other vias: 31.75,36.83
S$479  (via drill 1 pad 1.93)
  other vias: 31.75,34.29
S$480  (via drill 1 pad 1.93)
  other vias: 31.75,31.75
S$481  (via drill 1 pad 1.93)
  other vias: 31.75,29.21
S$482  (via drill 1 pad 1.93)
  other vias: 11.43,39.37 11.43,41.91 11.43,44.45
S$483  (via drill 1 pad 1.93)
  other vias: 11.43,36.83
S$484  (via drill 1 pad 1.93)
  other vias: 11.43,34.29
S$485  (via drill 1 pad 1.93)
  other vias: 11.43,31.75
S$486  (via drill 1 pad 1.93)
  other vias: 11.43,29.21
S$487  (via drill 1 pad 1.93)
  other vias: 11.43,26.67
S$488  (via drill 1 pad 1.93)
  other vias: 11.43,24.13
S$489  (via drill 1 pad 1.93)
  other vias: 11.43,21.59
S$490  (via drill 1 pad 1.93)
  other vias: 11.43,19.05
S$491  (via drill 1 pad 1.93)
  other vias: 11.43,16.51
S$492  (via drill 1 pad 1.93)
  other vias: 11.43,8.89 11.43,11.43 11.43,13.97
S$493  (via drill 1 pad 1.93)
  other vias: 11.43,6.35
S$494  (via drill 1 pad 1.93)
  other vias: 11.43,3.81
S$495  (via drill 1 pad 1.93)
  other vias: 11.43,1.27
S$496  (via drill 1 pad 1.93)
  other vias: 31.75,26.67
S$497  (via drill 1 pad 1.93)
  other vias: 31.75,24.13
S$498  (via drill 1 pad 1.93)
  other vias: 31.75,21.59
S$499  (via drill 1 pad 1.93)
  other vias: 31.75,19.05
S$500  (via drill 1 pad 1.93)
  other vias: 31.75,16.51
S$501  (via drill 1 pad 1.93)
  other vias: 26.67,8.89 26.67,11.43 26.67,13.97
S$502  (via drill 1 pad 1.93)
  other vias: 80.01,64.77
S$503  (via drill 1 pad 1.93)
  other vias: 80.01,62.23
S$504  (via drill 1 pad 1.93)
  other vias: 80.01,59.69
S$505  (via drill 1 pad 1.93)
  other vias: 80.01,57.15
S$506  (via drill 1 pad 1.93)
  other vias: 80.01,54.61
S$507  (via drill 1 pad 1.93)
  other vias: 80.01,52.07
S$508  (via drill 1 pad 1.93)
  other vias: 80.01,49.53
S$509  (via drill 1 pad 1.93)
  other vias: 52.07,82.55
S$510  (via drill 1 pad 1.93)
  other vias: 52.07,80.01
S$511  (via drill 1 pad 1.93)
  other vias: 52.07,77.47
S$512  (via drill 1 pad 1.93)
  other vias: 80.01,46.99
S$513  (via drill 1 pad 1.93)
  other vias: 82.55,69.85 82.55,72.39 82.55,74.93
S$514  (via drill 1 pad 1.93)
  other vias: 82.55,67.31
S$515  (via drill 1 pad 1.93)
  other vias: 82.55,64.77
S$516  (via drill 1 pad 1.93)
  other vias: 82.55,62.23
S$517  (via drill 1 pad 1.93)
  other vias: 82.55,59.69
S$518  (via drill 1 pad 1.93)
  other vias: 82.55,57.15
S$519  (via drill 1 pad 1.93)
  other vias: 54.61,82.55
S$520  (via drill 1 pad 1.93)
  other vias: 54.61,80.01
S$521  (via drill 1 pad 1.93)
  other vias: 54.61,77.47
S$522  (via drill 1 pad 1.93)
  other vias: 82.55,54.61
S$523  (via drill 1 pad 1.93)
  other vias: 82.55,52.07
S$524  (via drill 1 pad 1.93)
  other vias: 82.55,49.53
S$525  (via drill 1 pad 1.93)
  other vias: 82.55,46.99
S$526  (via drill 1 pad 1.93)
  other vias: 85.09,82.55
S$527  (via drill 1 pad 1.93)
  other vias: 85.09,80.01
S$528  (via drill 1 pad 1.93)
  other vias: 85.09,77.47
S$529  (via drill 1 pad 1.93)
  other vias: 57.15,82.55
S$530  (via drill 1 pad 1.93)
  other vias: 57.15,80.01
S$531  (via drill 1 pad 1.93)
  other vias: 57.15,77.47
S$532  (via drill 1 pad 1.93)
  other vias: 52.07,69.85 52.07,72.39 52.07,74.93
S$533  (via drill 1 pad 1.93)
  other vias: 52.07,67.31
S$534  (via drill 1 pad 1.93)
  other vias: 52.07,64.77
S$535  (via drill 1 pad 1.93)
  other vias: 52.07,62.23
S$536  (via drill 1 pad 1.93)
  other vias: 52.07,59.69
S$537  (via drill 1 pad 1.93)
  other vias: 52.07,57.15
S$538  (via drill 1 pad 1.93)
  other vias: 52.07,54.61
S$539  (via drill 1 pad 1.93)
  other vias: 52.07,52.07
S$540  (via drill 1 pad 1.93)
  other vias: 52.07,49.53
S$541  (via drill 1 pad 1.93)
  other vias: 52.07,46.99
S$542  (via drill 1 pad 1.93)
  other vias: 54.61,69.85 54.61,72.39 54.61,74.93
S$543  (via drill 1 pad 1.93)
  other vias: 54.61,67.31
S$544  (via drill 1 pad 1.93)
  other vias: 54.61,64.77
S$545  (via drill 1 pad 1.93)
  other vias: 54.61,62.23
S$546  (via drill 1 pad 1.93)
  other vias: 54.61,59.69
S$547  (via drill 1 pad 1.93)
  other vias: 54.61,57.15
S$548  (via drill 1 pad 1.93)
  other vias: 54.61,54.61
S$549  (via drill 1 pad 1.93)
  other vias: 54.61,52.07
S$550  (via drill 1 pad 1.93)
  other vias: 54.61,49.53
S$551  (via drill 1 pad 1.93)
  other vias: 54.61,46.99
S$552  (via drill 1 pad 1.93)
  other vias: 57.15,69.85 57.15,72.39 57.15,74.93
S$553  (via drill 1 pad 1.93)
  other vias: 57.15,67.31
S$554  (via drill 1 pad 1.93)
  other vias: 57.15,64.77
S$555  (via drill 1 pad 1.93)
  other vias: 57.15,62.23
S$556  (via drill 1 pad 1.93)
  other vias: 57.15,59.69
S$557  (via drill 1 pad 1.93)
  other vias: 57.15,57.15
S$558  (via drill 1 pad 1.93)
  other vias: 57.15,54.61
S$559  (via drill 1 pad 1.93)
  other vias: 57.15,52.07
S$560  (via drill 1 pad 1.93)
  other vias: 57.15,49.53
S$561  (via drill 1 pad 1.93)
  other vias: 57.15,46.99
S$562  (via drill 1 pad 1.93)
  other vias: 85.09,69.85 85.09,72.39 85.09,74.93
S$563  (via drill 1 pad 1.93)
  other vias: 85.09,67.31
S$564  (via drill 1 pad 1.93)
  other vias: 85.09,64.77
S$565  (via drill 1 pad 1.93)
  other vias: 85.09,62.23
S$566  (via drill 1 pad 1.93)
  other vias: 85.09,59.69
S$567  (via drill 1 pad 1.93)
  other vias: 85.09,57.15
S$568  (via drill 1 pad 1.93)
  other vias: 85.09,54.61
S$569  (via drill 1 pad 1.93)
  other vias: 59.69,82.55
S$570  (via drill 1 pad 1.93)
  other vias: 59.69,80.01
S$571  (via drill 1 pad 1.93)
  other vias: 59.69,77.47
S$572  (via drill 1 pad 1.93)
  other vias: 59.69,69.85 59.69,72.39 59.69,74.93
S$573  (via drill 1 pad 1.93)
  other vias: 59.69,67.31
S$574  (via drill 1 pad 1.93)
  other vias: 59.69,64.77
S$575  (via drill 1 pad 1.93)
  other vias: 59.69,62.23
S$576  (via drill 1 pad 1.93)
  other vias: 59.69,59.69
S$577  (via drill 1 pad 1.93)
  other vias: 59.69,57.15
S$578  (via drill 1 pad 1.93)
  other vias: 59.69,54.61
S$579  (via drill 1 pad 1.93)
  other vias: 59.69,52.07
S$580  (via drill 1 pad 1.93)
  other vias: 59.69,49.53
S$581  (via drill 1 pad 1.93)
  other vias: 59.69,46.99
S$582  (via drill 1 pad 1.93)
  other vias: 85.09,52.07
S$583  (via drill 1 pad 1.93)
  other vias: 85.09,49.53
S$584  (via drill 1 pad 1.93)
  other vias: 85.09,46.99
S$585  (via drill 1 pad 1.93)
  other vias: 87.63,82.55
S$586  (via drill 1 pad 1.93)
  other vias: 87.63,80.01
S$587  (via drill 1 pad 1.93)
  other vias: 87.63,77.47
S$588  (via drill 1 pad 1.93)
  other vias: 87.63,69.85 87.63,72.39 87.63,74.93
S$589  (via drill 1 pad 1.93)
  other vias: 62.23,82.55
S$590  (via drill 1 pad 1.93)
  other vias: 62.23,80.01
S$591  (via drill 1 pad 1.93)
  other vias: 62.23,77.47
S$592  (via drill 1 pad 1.93)
  other vias: 62.23,69.85 62.23,72.39 62.23,74.93
S$593  (via drill 1 pad 1.93)
  other vias: 62.23,67.31
S$594  (via drill 1 pad 1.93)
  other vias: 62.23,64.77
S$595  (via drill 1 pad 1.93)
  other vias: 62.23,62.23
S$596  (via drill 1 pad 1.93)
  other vias: 62.23,59.69
S$597  (via drill 1 pad 1.93)
  other vias: 62.23,57.15
S$598  (via drill 1 pad 1.93)
  other vias: 62.23,54.61
S$599  (via drill 1 pad 1.93)
  other vias: 62.23,52.07
S$600  (via drill 1 pad 1.93)
  other vias: 62.23,49.53
S$601  (via drill 1 pad 1.93)
  other vias: 62.23,46.99
S$602  (via drill 1 pad 1.93)
  other vias: 87.63,67.31
S$603  (via drill 1 pad 1.93)
  other vias: 87.63,64.77
S$604  (via drill 1 pad 1.93)
  other vias: 87.63,62.23
S$605  (via drill 1 pad 1.93)
  other vias: 87.63,59.69
S$606  (via drill 1 pad 1.93)
  other vias: 87.63,57.15
S$607  (via drill 1 pad 1.93)
  other vias: 87.63,54.61
S$608  (via drill 1 pad 1.93)
  other vias: 87.63,52.07
S$609  (via drill 1 pad 1.93)
  other vias: 64.77,82.55
S$610  (via drill 1 pad 1.93)
  other vias: 64.77,80.01
S$611  (via drill 1 pad 1.93)
  other vias: 64.77,77.47
S$612  (via drill 1 pad 1.93)
  other vias: 87.63,49.53
S$613  (via drill 1 pad 1.93)
  other vias: 87.63,46.99
S$614  (via drill 1 pad 1.93)
  other vias: 90.17,82.55
S$615  (via drill 1 pad 1.93)
  other vias: 90.17,80.01
S$616  (via drill 1 pad 1.93)
  other vias: 90.17,77.47
S$617  (via drill 1 pad 1.93)
  other vias: 92.71,82.55
S$618  (via drill 1 pad 1.93)
  other vias: 92.71,80.01
S$619  (via drill 1 pad 1.93)
  other vias: 67.31,82.55
S$620  (via drill 1 pad 1.93)
  other vias: 67.31,80.01
S$621  (via drill 1 pad 1.93)
  other vias: 67.31,77.47
S$622  (via drill 1 pad 1.93)
  other vias: 92.71,77.47
S$623  (via drill 1 pad 1.93)
  other vias: 95.25,82.55
S$624  (via drill 1 pad 1.93)
  other vias: 95.25,80.01
S$625  (via drill 1 pad 1.93)
  other vias: 95.25,77.47
S$626  (via drill 1 pad 1.93)
  other vias: 90.17,69.85 90.17,72.39 90.17,74.93
S$627  (via drill 1 pad 1.93)
  other vias: 90.17,67.31
S$628  (via drill 1 pad 1.93)
  other vias: 90.17,64.77
S$629  (via drill 1 pad 1.93)
  other vias: 69.85,82.55
S$630  (via drill 1 pad 1.93)
  other vias: 69.85,80.01
S$631  (via drill 1 pad 1.93)
  other vias: 69.85,77.47
S$632  (via drill 1 pad 1.93)
  other vias: 64.77,69.85 64.77,72.39 64.77,74.93
S$633  (via drill 1 pad 1.93)
  other vias: 64.77,67.31
S$634  (via drill 1 pad 1.93)
  other vias: 64.77,64.77
S$635  (via drill 1 pad 1.93)
  other vias: 64.77,62.23
S$636  (via drill 1 pad 1.93)
  other vias: 64.77,59.69
S$637  (via drill 1 pad 1.93)
  other vias: 64.77,57.15
S$638  (via drill 1 pad 1.93)
  other vias: 64.77,54.61
S$639  (via drill 1 pad 1.93)
  other vias: 64.77,52.07
S$640  (via drill 1 pad 1.93)
  other vias: 64.77,49.53
S$641  (via drill 1 pad 1.93)
  other vias: 64.77,46.99
S$642  (via drill 1 pad 1.93)
  other vias: 67.31,69.85 67.31,72.39 67.31,74.93
S$643  (via drill 1 pad 1.93)
  other vias: 67.31,67.31
S$644  (via drill 1 pad 1.93)
  other vias: 67.31,64.77
S$645  (via drill 1 pad 1.93)
  other vias: 67.31,62.23
S$646  (via drill 1 pad 1.93)
  other vias: 67.31,59.69
S$647  (via drill 1 pad 1.93)
  other vias: 67.31,57.15
S$648  (via drill 1 pad 1.93)
  other vias: 67.31,54.61
S$649  (via drill 1 pad 1.93)
  other vias: 67.31,52.07
S$650  (via drill 1 pad 1.93)
  other vias: 67.31,49.53
S$651  (via drill 1 pad 1.93)
  other vias: 67.31,46.99
S$652  (via drill 1 pad 1.93)
  other vias: 69.85,69.85 69.85,72.39 69.85,74.93
S$653  (via drill 1 pad 1.93)
  other vias: 69.85,67.31
S$654  (via drill 1 pad 1.93)
  other vias: 69.85,64.77
S$655  (via drill 1 pad 1.93)
  other vias: 69.85,62.23
S$656  (via drill 1 pad 1.93)
  other vias: 69.85,59.69
S$657  (via drill 1 pad 1.93)
  other vias: 69.85,57.15
S$658  (via drill 1 pad 1.93)
  other vias: 69.85,54.61
S$659  (via drill 1 pad 1.93)
  other vias: 69.85,52.07
S$660  (via drill 1 pad 1.93)
  other vias: 69.85,49.53
S$661  (via drill 1 pad 1.93)
  other vias: 69.85,46.99
S$662  (via drill 1 pad 1.93)
  other vias: 90.17,62.23
S$663  (via drill 1 pad 1.93)
  other vias: 90.17,59.69
S$664  (via drill 1 pad 1.93)
  other vias: 90.17,57.15
S$665  (via drill 1 pad 1.93)
  other vias: 90.17,54.61
S$666  (via drill 1 pad 1.93)
  other vias: 90.17,52.07
S$667  (via drill 1 pad 1.93)
  other vias: 90.17,49.53
S$668  (via drill 1 pad 1.93)
  other vias: 90.17,46.99
S$669  (via drill 1 pad 1.93)
  other vias: 72.39,82.55
S$670  (via drill 1 pad 1.93)
  other vias: 72.39,80.01
S$671  (via drill 1 pad 1.93)
  other vias: 72.39,77.47
S$672  (via drill 1 pad 1.93)
  other vias: 72.39,69.85 72.39,72.39 72.39,74.93
S$673  (via drill 1 pad 1.93)
  other vias: 72.39,67.31
S$674  (via drill 1 pad 1.93)
  other vias: 72.39,64.77
S$675  (via drill 1 pad 1.93)
  other vias: 72.39,62.23
S$676  (via drill 1 pad 1.93)
  other vias: 72.39,59.69
S$677  (via drill 1 pad 1.93)
  other vias: 72.39,57.15
S$678  (via drill 1 pad 1.93)
  other vias: 72.39,54.61
S$679  (via drill 1 pad 1.93)
  other vias: 72.39,52.07
S$680  (via drill 1 pad 1.93)
  other vias: 72.39,49.53
S$681  (via drill 1 pad 1.93)
  other vias: 72.39,46.99
S$682  (via drill 1 pad 1.93)
  other vias: 92.71,69.85 92.71,72.39 92.71,74.93
S$683  (via drill 1 pad 1.93)
  other vias: 92.71,67.31
S$684  (via drill 1 pad 1.93)
  other vias: 92.71,64.77
S$685  (via drill 1 pad 1.93)
  other vias: 92.71,62.23
S$686  (via drill 1 pad 1.93)
  other vias: 92.71,59.69
S$687  (via drill 1 pad 1.93)
  other vias: 92.71,57.15
S$688  (via drill 1 pad 1.93)
  other vias: 92.71,54.61
S$689  (via drill 1 pad 1.93)
  other vias: 74.93,82.55
S$690  (via drill 1 pad 1.93)
  other vias: 74.93,80.01
S$691  (via drill 1 pad 1.93)
  other vias: 74.93,77.47
S$692  (via drill 1 pad 1.93)
  other vias: 74.93,69.85 74.93,72.39 74.93,74.93
S$693  (via drill 1 pad 1.93)
  other vias: 74.93,67.31
S$694  (via drill 1 pad 1.93)
  other vias: 74.93,64.77
S$695  (via drill 1 pad 1.93)
  other vias: 74.93,62.23
S$696  (via drill 1 pad 1.93)
  other vias: 74.93,59.69
S$697  (via drill 1 pad 1.93)
  other vias: 74.93,57.15
S$698  (via drill 1 pad 1.93)
  other vias: 74.93,54.61
S$699  (via drill 1 pad 1.93)
  other vias: 74.93,52.07
S$700  (via drill 1 pad 1.93)
  other vias: 74.93,49.53
S$701  (via drill 1 pad 1.93)
  other vias: 74.93,46.99
S$702  (via drill 1 pad 1.93)
  other vias: 13.97,39.37 13.97,41.91 13.97,44.45
S$703  (via drill 1 pad 1.93)
  other vias: 13.97,36.83
S$704  (via drill 1 pad 1.93)
  other vias: 13.97,34.29
S$705  (via drill 1 pad 1.93)
  other vias: 13.97,31.75
S$706  (via drill 1 pad 1.93)
  other vias: 13.97,29.21
S$707  (via drill 1 pad 1.93)
  other vias: 13.97,26.67
S$708  (via drill 1 pad 1.93)
  other vias: 13.97,24.13
S$709  (via drill 1 pad 1.93)
  other vias: 13.97,21.59
S$710  (via drill 1 pad 1.93)
  other vias: 13.97,19.05
S$711  (via drill 1 pad 1.93)
  other vias: 13.97,16.51
S$712  (via drill 1 pad 1.93)
  other vias: 16.51,39.37 16.51,41.91 16.51,44.45
S$713  (via drill 1 pad 1.93)
  other vias: 16.51,36.83
S$714  (via drill 1 pad 1.93)
  other vias: 16.51,34.29
S$715  (via drill 1 pad 1.93)
  other vias: 16.51,31.75
S$716  (via drill 1 pad 1.93)
  other vias: 16.51,29.21
S$717  (via drill 1 pad 1.93)
  other vias: 16.51,26.67
S$718  (via drill 1 pad 1.93)
  other vias: 16.51,24.13
S$719  (via drill 1 pad 1.93)
  other vias: 16.51,21.59
S$720  (via drill 1 pad 1.93)
  other vias: 16.51,19.05
S$721  (via drill 1 pad 1.93)
  other vias: 16.51,16.51
S$722  (via drill 1 pad 1.93)
  other vias: 19.05,39.37 19.05,41.91 19.05,44.45
S$723  (via drill 1 pad 1.93)
  other vias: 19.05,36.83
S$724  (via drill 1 pad 1.93)
  other vias: 19.05,34.29
S$725  (via drill 1 pad 1.93)
  other vias: 19.05,31.75
S$726  (via drill 1 pad 1.93)
  other vias: 19.05,29.21
S$727  (via drill 1 pad 1.93)
  other vias: 19.05,26.67
S$728  (via drill 1 pad 1.93)
  other vias: 19.05,24.13
S$729  (via drill 1 pad 1.93)
  other vias: 19.05,21.59
S$730  (via drill 1 pad 1.93)
  other vias: 19.05,19.05
S$731  (via drill 1 pad 1.93)
  other vias: 19.05,16.51
S$732  (via drill 1 pad 1.93)
  other vias: 13.97,8.89 13.97,11.43 13.97,13.97
S$733  (via drill 1 pad 1.93)
  other vias: 13.97,6.35
S$734  (via drill 1 pad 1.93)
  other vias: 13.97,3.81
S$735  (via drill 1 pad 1.93)
  other vias: 13.97,1.27
S$736  (via drill 1 pad 1.93)
  other vias: 26.67,6.35
S$737  (via drill 1 pad 1.93)
  other vias: 26.67,3.81
S$738  (via drill 1 pad 1.93)
  other vias: 26.67,1.27
S$739  (via drill 1 pad 1.93)
  other vias: 29.21,8.89 29.21,11.43 29.21,13.97
S$740  (via drill 1 pad 1.93)
  other vias: 29.21,6.35
S$741  (via drill 1 pad 1.93)
  other vias: 29.21,3.81
S$742  (via drill 1 pad 1.93)
  other vias: 16.51,8.89 16.51,11.43 16.51,13.97
S$743  (via drill 1 pad 1.93)
  other vias: 16.51,6.35
S$744  (via drill 1 pad 1.93)
  other vias: 16.51,3.81
S$745  (via drill 1 pad 1.93)
  other vias: 16.51,1.27
S$746  (via drill 1 pad 1.93)
  other vias: 29.21,1.27
S$747  (via drill 1 pad 1.93)
  other vias: 31.75,8.89 31.75,11.43 31.75,13.97
S$748  (via drill 1 pad 1.93)
  other vias: 31.75,6.35
S$749  (via drill 1 pad 1.93)
  other vias: 31.75,3.81
S$750  (via drill 1 pad 1.93)
  other vias: 31.75,1.27
S$751  (via drill 1 pad 1.93)
  other vias: 34.29,39.37 34.29,41.91 34.29,44.45
S$752  (via drill 1 pad 1.93)
  other vias: 19.05,8.89 19.05,11.43 19.05,13.97
S$753  (via drill 1 pad 1.93)
  other vias: 19.05,6.35
S$754  (via drill 1 pad 1.93)
  other vias: 19.05,3.81
S$755  (via drill 1 pad 1.93)
  other vias: 19.05,1.27
S$756  (via drill 1 pad 1.93)
  other vias: 34.29,36.83
S$757  (via drill 1 pad 1.93)
  other vias: 8.89,1.27
S$758  (via drill 1 pad 1.93)
  other vias: 34.29,34.29
S$759  (via drill 1 pad 1.93)
  other vias: 34.29,31.75
S$760  (via drill 1 pad 1.93)
  other vias: 34.29,29.21
S$761  (via drill 1 pad 1.93)
  other vias: 34.29,26.67
S$762  (via drill 1 pad 1.93)
  other vias: 21.59,39.37 21.59,41.91 21.59,44.45
S$763  (via drill 1 pad 1.93)
  other vias: 21.59,36.83
S$764  (via drill 1 pad 1.93)
  other vias: 21.59,34.29
S$765  (via drill 1 pad 1.93)
  other vias: 21.59,31.75
S$766  (via drill 1 pad 1.93)
  other vias: 21.59,29.21
S$767  (via drill 1 pad 1.93)
  other vias: 21.59,26.67
S$768  (via drill 1 pad 1.93)
  other vias: 21.59,24.13
S$769  (via drill 1 pad 1.93)
  other vias: 21.59,21.59
S$770  (via drill 1 pad 1.93)
  other vias: 21.59,19.05
S$771  (via drill 1 pad 1.93)
  other vias: 21.59,16.51
S$772  (via drill 1 pad 1.93)
  other vias: 21.59,8.89 21.59,11.43 21.59,13.97
S$773  (via drill 1 pad 1.93)
  other vias: 21.59,6.35
S$774  (via drill 1 pad 1.93)
  other vias: 21.59,3.81
S$775  (via drill 1 pad 1.93)
  other vias: 21.59,1.27
S$776  (via drill 1 pad 1.93)
  other vias: 34.29,24.13
S$777  (via drill 1 pad 1.93)
  other vias: 34.29,21.59
S$778  (via drill 1 pad 1.93)
  other vias: 34.29,19.05
S$779  (via drill 1 pad 1.93)
  other vias: 34.29,16.51
S$780  (via drill 1 pad 1.93)
  other vias: 34.29,8.89 34.29,11.43 34.29,13.97
S$781  (via drill 1 pad 1.93)
  other vias: 34.29,6.35
S$782  (via drill 1 pad 1.93)
  other vias: 24.13,39.37 24.13,41.91 24.13,44.45
S$783  (via drill 1 pad 1.93)
  other vias: 24.13,36.83
S$784  (via drill 1 pad 1.93)
  other vias: 24.13,34.29
S$785  (via drill 1 pad 1.93)
  other vias: 24.13,31.75
S$786  (via drill 1 pad 1.93)
  other vias: 24.13,29.21
S$787  (via drill 1 pad 1.93)
  other vias: 24.13,26.67
S$788  (via drill 1 pad 1.93)
  other vias: 24.13,24.13
S$789  (via drill 1 pad 1.93)
  other vias: 24.13,21.59
S$790  (via drill 1 pad 1.93)
  other vias: 24.13,19.05
S$791  (via drill 1 pad 1.93)
  other vias: 24.13,16.51
S$792  (via drill 1 pad 1.93)
  other vias: 24.13,8.89 24.13,11.43 24.13,13.97
S$793  (via drill 1 pad 1.93)
  other vias: 24.13,6.35
S$794  (via drill 1 pad 1.93)
  other vias: 24.13,3.81
S$795  (via drill 1 pad 1.93)
  other vias: 24.13,1.27
S$796  (via drill 1 pad 1.93)
  other vias: 34.29,3.81
S$797  (via drill 1 pad 1.93)
  other vias: 36.83,39.37 36.83,41.91 36.83,44.45
S$798  (via drill 1 pad 1.93)
  other vias: 36.83,36.83
S$799  (via drill 1 pad 1.93)
  other vias: 36.83,34.29
S$800  (via drill 1 pad 1.93)
  other vias: 36.83,31.75
S$801  (via drill 1 pad 1.93)
  other vias: 36.83,29.21
S$802  (via drill 1 pad 1.93)
  other vias: 36.83,26.67
S$803  (via drill 1 pad 1.93)
  other vias: 36.83,24.13
S$804  (via drill 1 pad 1.93)
  other vias: 36.83,21.59
S$805  (via drill 1 pad 1.93)
  other vias: 36.83,19.05
S$806  (via drill 1 pad 1.93)
  other vias: 36.83,16.51
S$807  (via drill 1 pad 1.93)
  other vias: 36.83,8.89 36.83,11.43 36.83,13.97
S$808  (via drill 1 pad 1.93)
  other vias: 36.83,6.35
S$809  (via drill 1 pad 1.93)
  other vias: 36.83,3.81
S$810  (via drill 1 pad 1.93)
  other vias: 36.83,1.27
S$811  (via drill 1 pad 1.93)
  other vias: 39.37,39.37 39.37,41.91 39.37,44.45
S$812  (via drill 1 pad 1.93)
  other vias: 39.37,36.83
S$813  (via drill 1 pad 1.93)
  other vias: 39.37,34.29
S$814  (via drill 1 pad 1.93)
  other vias: 39.37,31.75
S$815  (via drill 1 pad 1.93)
  other vias: 39.37,29.21
S$816  (via drill 1 pad 1.93)
  other vias: 39.37,26.67
S$817  (via drill 1 pad 1.93)
  other vias: 39.37,24.13
S$818  (via drill 1 pad 1.93)
  other vias: 39.37,21.59
S$819  (via drill 1 pad 1.93)
  other vias: 39.37,19.05
S$820  (via drill 1 pad 1.93)
  other vias: 39.37,16.51
S$821  (via drill 1 pad 1.93)
  other vias: 41.91,39.37 41.91,41.91 41.91,44.45
S$822  (via drill 1 pad 1.93)
  other vias: 41.91,36.83
S$823  (via drill 1 pad 1.93)
  other vias: 41.91,34.29
S$824  (via drill 1 pad 1.93)
  other vias: 41.91,31.75
S$825  (via drill 1 pad 1.93)
  other vias: 41.91,29.21
S$826  (via drill 1 pad 1.93)
  other vias: 41.91,26.67
S$827  (via drill 1 pad 1.93)
  other vias: 41.91,24.13
S$828  (via drill 1 pad 1.93)
  other vias: 41.91,21.59
S$829  (via drill 1 pad 1.93)
  other vias: 41.91,19.05
S$830  (via drill 1 pad 1.93)
  other vias: 41.91,16.51
S$831  (via drill 1 pad 1.93)
  other vias: 44.45,39.37 44.45,41.91 44.45,44.45
S$832  (via drill 1 pad 1.93)
  other vias: 44.45,36.83
S$833  (via drill 1 pad 1.93)
  other vias: 44.45,34.29
S$834  (via drill 1 pad 1.93)
  other vias: 44.45,31.75
S$835  (via drill 1 pad 1.93)
  other vias: 44.45,29.21
S$836  (via drill 1 pad 1.93)
  other vias: 44.45,26.67
S$837  (via drill 1 pad 1.93)
  other vias: 44.45,24.13
S$838  (via drill 1 pad 1.93)
  other vias: 44.45,21.59
S$839  (via drill 1 pad 1.93)
  other vias: 44.45,19.05